# Altium PCB sdram_sram.PcbDoc
Units mm, origin at the board's own origin, x right, y up, seen from the top; angles counter-clockwise.
Board outline 29.21 x 50.8 mm, 2 copper layers (Top Layer, Bottom Layer), stack 1.671 mm thick; 10 components, 41 nets, 156 pads, 41 vias.
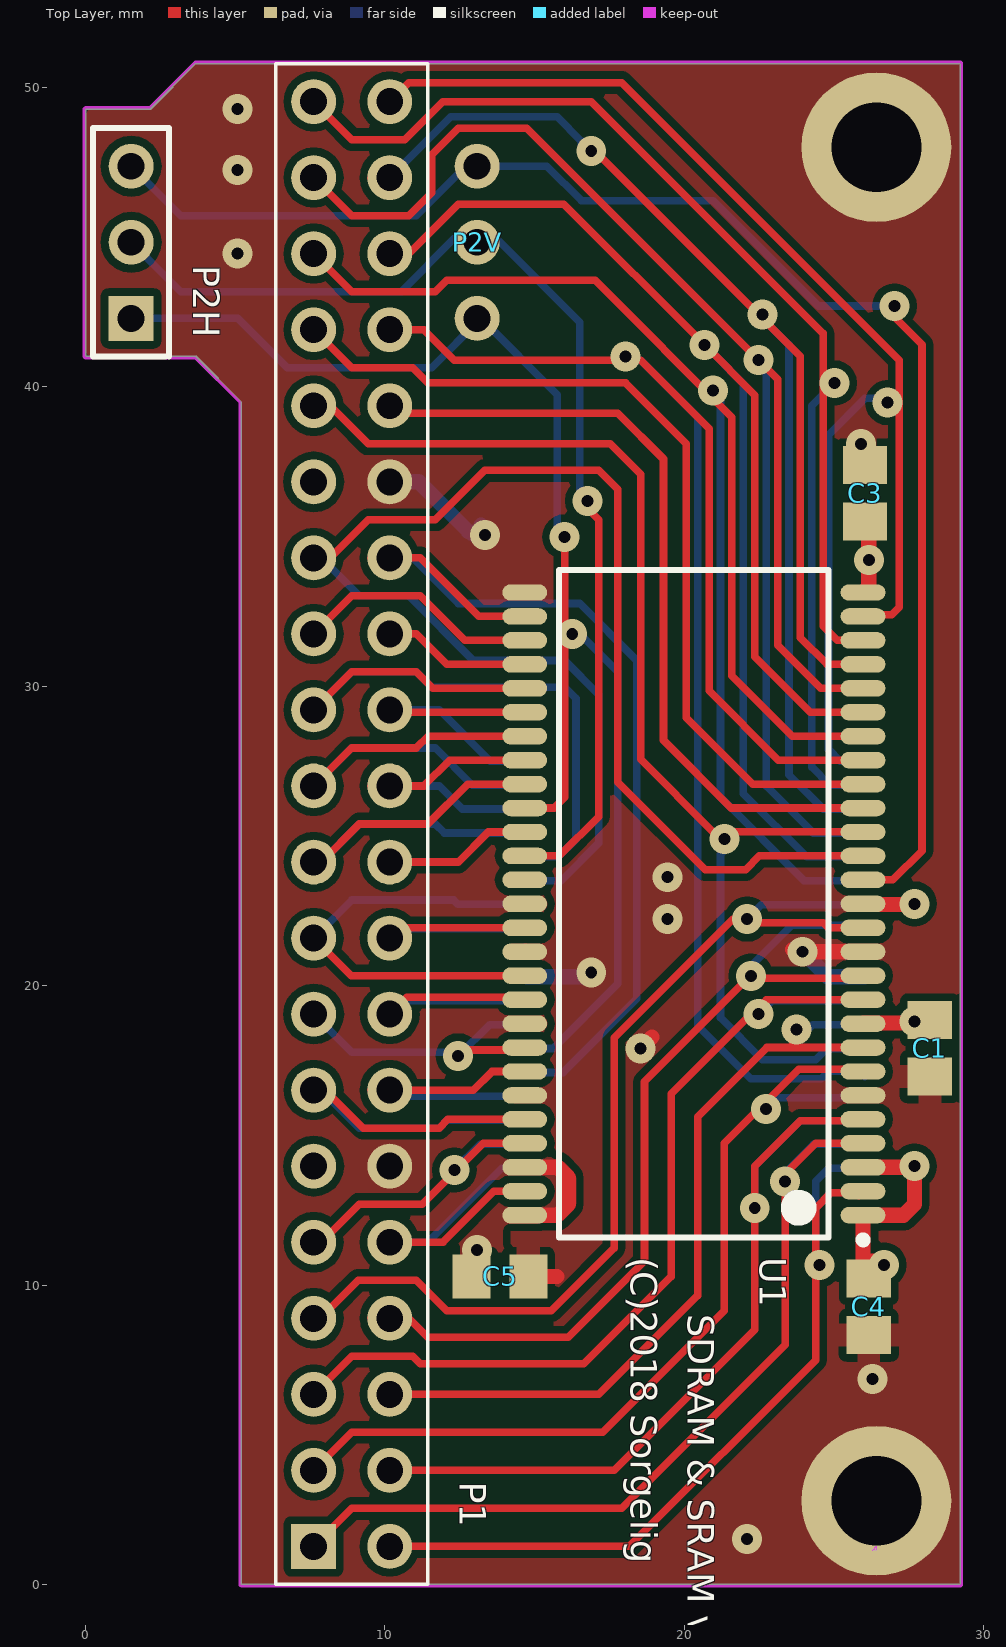
[diagram p0: Top Layer view]
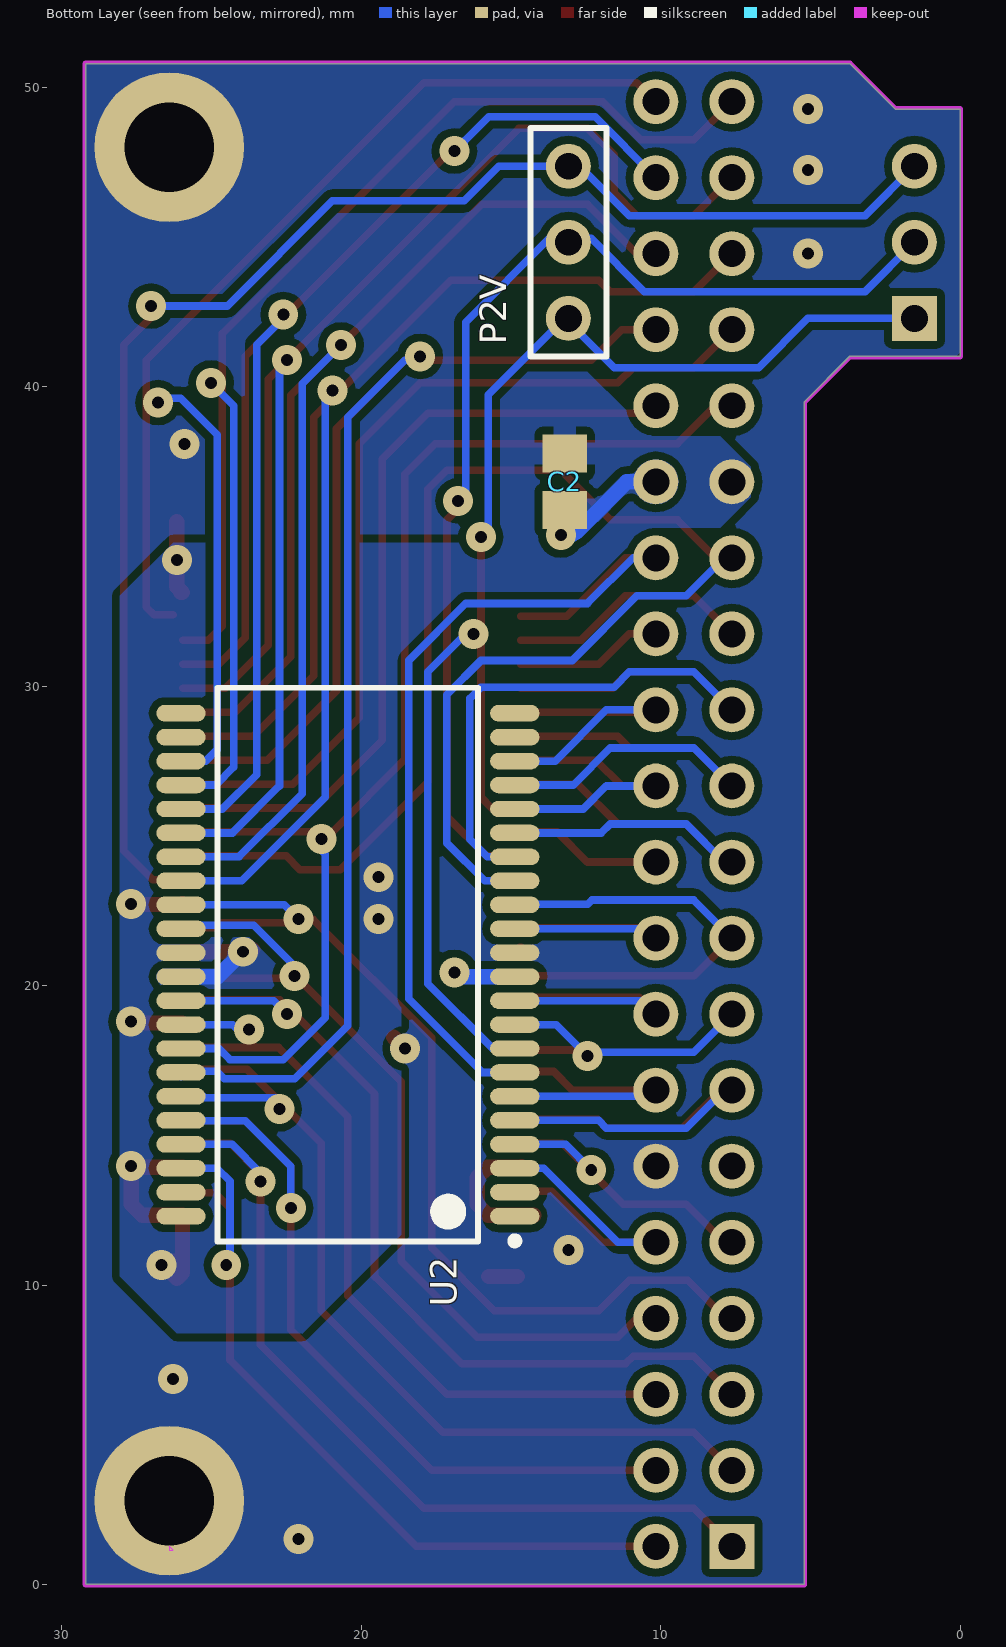
[diagram p1: Bottom Layer view, seen from below]
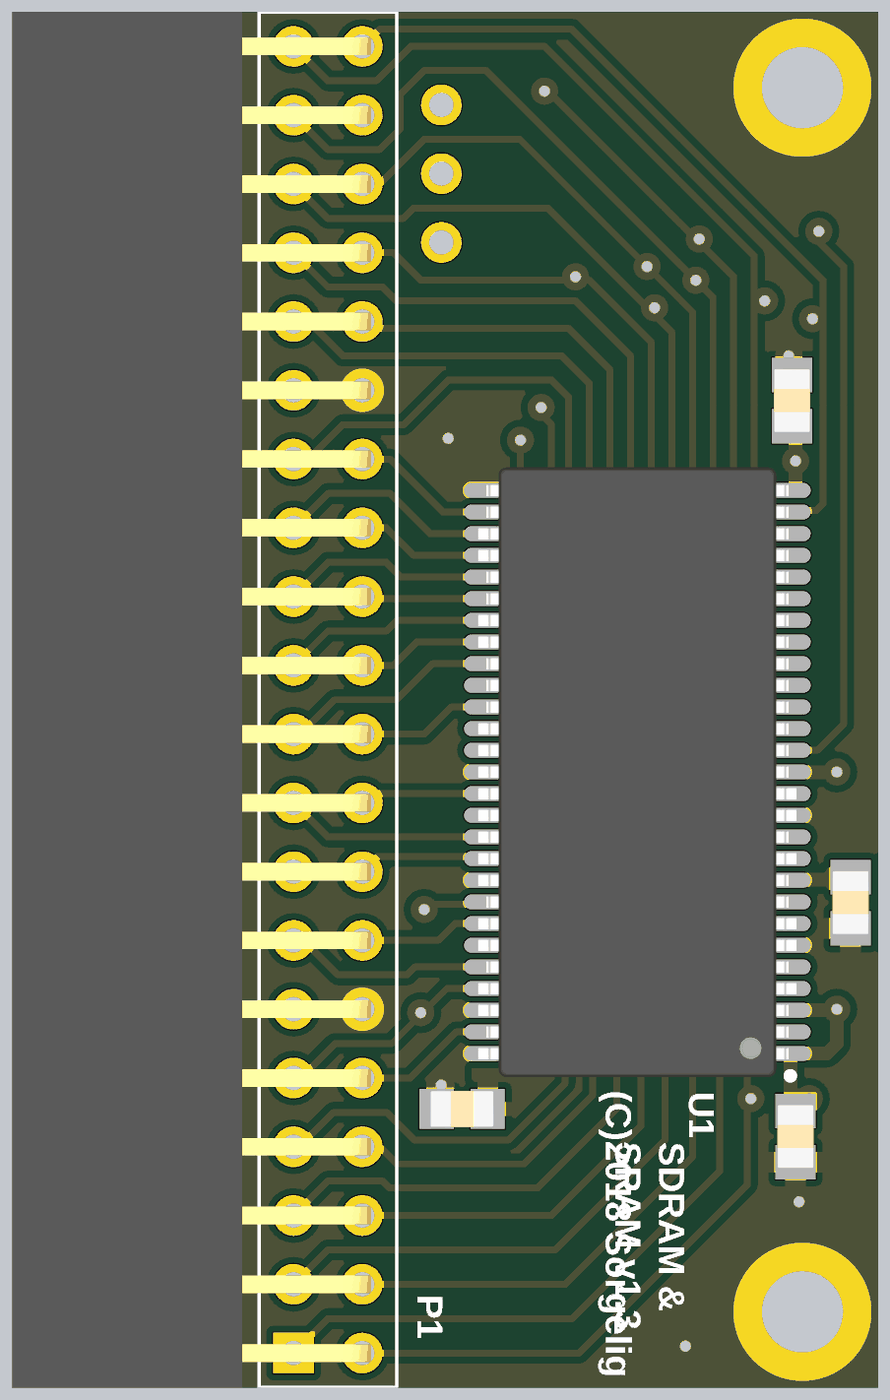
[diagram p2: 3D render of the assembled board from above, using the file's embedded part models]

## Layer stack, top to bottom
Top Solder: solder mask 0.0102, Solder Resist, Dk 3.5
Top Layer: signal copper 0.0356
Dielectric 1: dielectric 1.6, FR-4, Dk 4.8
Bottom Layer: signal copper 0.0356
Bottom Solder: solder mask 0.0102, Solder Resist, Dk 3.5

## Board outline
5.207,39.497 3.683,41.021 0,41.021 0,49.276 2.159,49.276 3.683,50.8 29.21,50.8 29.21,0 5.207,0

## Design rules (kind name [scope] priority, off if disabled: settings)
BoardOutlineClearance [All] p1: gap=0 ignorepadtopadclearanceinfootprint=FALSE
Clearance keep-out_clearance [InNamedPolygon('ground') vs OnLayer('Keep-Out Layer')] p1: gap=0 ignorepadtopadclearanceinfootprint=FALSE
Clearance [All] p2: gap=0.254 ignorepadtopadclearanceinfootprint=TRUE except(0: Arc-Hole Track-Hole SMDPad-Hole THPad-Hole Via-Hole Fill-Hole Poly-Hole Region-Hole Text-Hole)
ComponentClearance [All] p1 off: gap=0.254 collisioncheckmode=3 verticalgap=0.254 showdistances=FALSE
Height [All] p1 off: minheight=0 maxheight=25.4 prefheight=12.7
HoleSize [All] p1: absolutevalues=TRUE maxlimit=6 minlimit=0.025 maxpercent=80.000 minpercent=20.000
MinimumSolderMaskSliver [All] p1: minsoldermaskwidth=0.25
PolygonConnect PolygonConnect_1 [HasFootprint('C0805')] p1: connectstyle=Relief reliefconductorwidth=0.762 reliefentries=4 polygonreliefangle="90 Angle" airgapwidth=0.254
PolygonConnect [All] p2: connectstyle=Direct reliefconductorwidth=0.254 reliefentries=4 polygonreliefangle="90 Angle" airgapwidth=0.254
RoutingVias [All] p1: holewidth=0.4 width=1 viastyle="Through Hole" minholewidth=0.4 minwidth=1 maxholewidth=0.4 maxwidth=1
SilkToSolderMaskClearance [IsPad] p1 off: minsilkscreentomaskgap=0.127 clearancetoexposedcopper=TRUE
SolderMaskExpansion SolderMaskExpansion_U1 [InComponent('U1')] p1: expansion=0
SolderMaskExpansion [All] p2: expansion=0.051
Width Width_power [InNetClass('power')] p1: maxlimit=2 minlimit=0.254 preferedwidth=0.508 minimp=50.000000 maximp=50.000000 favimp=50.000000
Width Width_signal [All] p2: maxlimit=0.254 minlimit=0.254 preferedwidth=0.254
25 further rules are at their usual default settings.

## Classes and differential pairs
net class power: GND VCC

## Components (designator, comment, footprint, x,y, rotation, side; value= is the part's Value field where it differs from the comment)
C1 "C0805" C0805 28.194,17.907 r90 top value=0.1uF
C2 "C0805" C0805 13.208,36.83 r90 bottom value=0.1uF
C3 "+" C0805 26.035,36.449 r270 top value=0.1uF
C4 "C0805" C0805 26.162,9.271 r90 top value=0.1uF
C5 "+" C0805 13.843,10.287 r0 top value=0.1uF
P1 "Header 20X2" HDR20x2_90 7.62,1.27 r270 top locked
P2H "Header 3" HDR1X3#1 1.524,42.291 r90 top locked
P2V "Header 3" HDR1X3#2 13.081,42.291 r90 top locked
U1 "AS4C16M16SA-6TCN" TSOP54 20.32,22.733 r180 top
U2 "IS61WV20488BLL-10" ISSI-TSOP-2-44_N 20.447,20.701 r0 bottom

## Footprints (in the part's own frame and the unit in brackets; to place one, negate y for a bottom-side part, rotate by r counter-clockwise, add the part's x,y. Pads: shape width x height; smd on the part's side, far side on the other; paste and mask are expansions set on the pad)
C0805 [mm] "Capacitor, Chip; 2.35 mm L X 1.35 mm W X 1.00 mm H body"
  rect 1.27x1.48 smd: 1(-0.945,0) 2(0.945,0)
  body extent -1.17,-0.67 1.17,0.67, height 1
HDR1X3#1 [mm] "Connector; Header; 3 Position"
  rect 1.5x1.5 hole 0.9: 1(0,0)
  round 1.5 hole 0.9: 2(2.54,0) 3(5.08,0)
  silkscreen extent -1.27,-1.27 6.35,1.27
HDR1X3#2 [mm] "Connector; Header; 3 Position"
  round 1.5 hole 0.9: 1(0,0) 2(2.54,0) 3(5.08,0)
HDR20x2_90 [mm] "Header, Right Angle Receptacle, 2.54 mm pitch; 0.65 mm lead width, 40 pins, 2 rows, 20 pins per row, 50.80 mm L X 8.50 mm W X 5.08 mm H body"
  rect 1.5x1.5 hole 0.9: 1(0,0)
  round 1.5 hole 0.9: 2(0,2.54) 3(-2.54,0) 4(-2.54,2.54) 5(-5.08,0) 6(-5.08,2.54) 7(-7.62,0) 8(-7.62,2.54) 9(-10.16,0) 10(-10.16,2.54) 11(-12.7,0) 12(-12.7,2.54) 13(-15.24,0) 14(-15.24,2.54) 15(-17.78,0) 16(-17.78,2.54) 17(-20.32,0) 18(-20.32,2.54) 19(-22.86,0) 20(-22.86,2.54) 21(-25.4,0) 22(-25.4,2.54) 23(-27.94,0) 24(-27.94,2.54) 25(-30.48,0) 26(-30.48,2.54) 27(-33.02,0) 28(-33.02,2.54) 29(-35.56,0) 30(-35.56,2.54) 31(-38.1,0) 32(-38.1,2.54) 33(-40.64,0) 34(-40.64,2.54) 35(-43.18,0) 36(-43.18,2.54) 37(-45.72,0) 38(-45.72,2.54) 39(-48.26,0) 40(-48.26,2.54)
  silkscreen extent -49.53,-1.27 1.27,3.81, body extent -49.53,-10.39 1.27,2.87, height 5.08
ISSI-TSOP-2-44_N [mm] "SOP, 44-Leads, Body 18.5x10.3mm, Pitch 0.8mm, IPC Medium Density"
  oval 1.65x0.55 smd mask+0: 1(-5.575,8.4) 2(-5.575,7.6) 3(-5.575,6.8) 4(-5.575,6) 5(-5.575,5.2) 6(-5.575,4.4) 7(-5.575,3.6) 8(-5.575,2.8) 9(-5.575,2) 10(-5.575,1.2) 11(-5.575,0.4) 12(-5.575,-0.4) 13(-5.575,-1.2) 14(-5.575,-2) 15(-5.575,-2.8) 16(-5.575,-3.6) 17(-5.575,-4.4) 18(-5.575,-5.2) 19(-5.575,-6) 20(-5.575,-6.8) 21(-5.575,-7.6) 22(-5.575,-8.4) 23(5.575,-8.4) 24(5.575,-7.6) 25(5.575,-6.8) 26(5.575,-6) 27(5.575,-5.2) 28(5.575,-4.4) 29(5.575,-3.6) 30(5.575,-2.8) 31(5.575,-2) 32(5.575,-1.2) 33(5.575,-0.4) 34(5.575,0.4) 35(5.575,1.2) 36(5.575,2) 37(5.575,2.8) 38(5.575,3.6) 39(5.575,4.4) 40(5.575,5.2) 41(5.575,6) 42(5.575,6.8) 43(5.575,7.6) 44(5.575,8.4)
  silkscreen extent -5.7,-9.25 4.35,9.35, body extent -5.15,-9.25 5.15,9.25, height 1.2
TSOP54 [mm] "SOP, 54-Leads, Body 22.3x10.2mm, Pitch 0.8mm, IPC Medium Density"
  oval 1.5x0.55 smd: 1(-5.65,10.4) 2(-5.65,9.6) 3(-5.65,8.8) 4(-5.65,8) 5(-5.65,7.2) 6(-5.65,6.4) 7(-5.65,5.6) 8(-5.65,4.8) 9(-5.65,4) 10(-5.65,3.2) 11(-5.65,2.4) 12(-5.65,1.6) 13(-5.65,0.8) 14(-5.65,0) 15(-5.65,-0.8) 16(-5.65,-1.6) 17(-5.65,-2.4) 18(-5.65,-3.2) 19(-5.65,-4) 20(-5.65,-4.8) 21(-5.65,-5.6) 22(-5.65,-6.4) 23(-5.65,-7.2) 24(-5.65,-8) 25(-5.65,-8.8) 26(-5.65,-9.6) 27(-5.65,-10.4) 28(5.65,-10.4) 29(5.65,-9.6) 30(5.65,-8.8) 31(5.65,-8) 32(5.65,-7.2) 33(5.65,-6.4) 34(5.65,-5.6) 35(5.65,-4.8) 36(5.65,-4) 37(5.65,-3.2) 38(5.65,-2.4) 39(5.65,-1.6) 40(5.65,-0.8) 41(5.65,0) 42(5.65,0.8) 43(5.65,1.6) 44(5.65,2.4) 45(5.65,3.2) 46(5.65,4) 47(5.65,4.8) 48(5.65,5.6) 49(5.65,6.4) 50(5.65,7.2) 51(5.65,8) 52(5.65,8.8) 53(5.65,9.6) 54(5.65,10.4)
  silkscreen extent -5.77,-11.15 4.5,11.35, body extent -5.88,-11.25 5.88,11.27, height 1

## Part data
C1 C2 C4: "Ceramic Chip Capacitor - Standard", PackageDocument=Mar-2001, Code_IPC=2012[0805], Code_JEITA=0805, ComponentLink1Description="Manufacturer Link", ComponentLink1URL=http://www.kemet.com/, ComponentLink2Description=Datasheet, ComponentLink2URL=http://www.kemet.com/kemet/web/homepage/kechome.nsf/vapubfilesname/F3102TA.pdf/$file/F3102TA.pdf, DatasheetDocument=Mar-2001, LatestRevisionDate=19-Mar-2004, LatestRevisionNote="Silkscreen size reduced.", Note="Footprint corresponds to dimensions for bulk cassette packaging. This case size has tightened tolerances.", PackageReference=0805, Published=17-Jul-2002, Publisher="Altium Limited"
C3 C5: library part C0805, "Ceramic Chip Capacitor - Standard", PackageDocument=Mar-2001, Code_IPC=2012[0805], Code_JEITA=0805, ComponentLink1Description="Manufacturer Link", ComponentLink1URL=http://www.kemet.com/, ComponentLink2Description=Datasheet, ComponentLink2URL=http://www.kemet.com/kemet/web/homepage/kechome.nsf/vapubfilesname/F3102TA.pdf/$file/F3102TA.pdf, DatasheetDocument=Mar-2001, LatestRevisionDate=19-Mar-2004, LatestRevisionNote="Silkscreen size reduced.", Note="Footprint corresponds to dimensions for bulk cassette packaging. This case size has tightened tolerances.", PackageReference=0805, Published=17-Jul-2002, Publisher="Altium Limited"
P1: "Header, 20-Pin, Dual row", LatestRevisionDate=17-Jul-2002, LatestRevisionNote="Re-released for DXP Platform.", Publisher="Altium Limited"
P2H P2V: "Header, 3-Pin", LatestRevisionDate=17-Jul-2002, LatestRevisionNote="Re-released for DXP Platform.", Publisher="Altium Limited"
U1: "256Mb SDR SDRAM, 16Mb x 16, 6ns, 3.3V, 54-Pin TSOP", Manufacturer=Micron, Op. Temp.="0C to +70C", PartNumber=MT48LC16M16A2P-6A, Voltage=3.3V, CL="CL = 3", Clock Rate="167 MHz", ComponentLink1Description="Manufacturer URL", ComponentLink1URL=http://www.micron.com/, ComponentLink2Description=Datasheet, ComponentLink2URL=http://www.micron.com/~/media/Documents/Products/Data%20Sheet/DRAM/256Mb_sdr.pdf, ComponentLink3Description="Package Specification", ComponentLink3URL=http://www.micron.com/~/media/Documents/Products/Data%20Sheet/DRAM/128mb_x4x8x16_sdram.pdf, Cycle Time=6ns, Data Rate=PC133, DatasheetVersion=Rev.Q, Density=256Mb, Depth=16Mb, Mounting Technology="Surface Mount", PackageDescription="54-Pin Thin Small Outline Package, 10.16 x 22.22 mm, Pitch 0.8 mm", PackageReference=MICT-P-54, PackageVersion=Rev.Q, RoHS=Yes, Width=x16
U2: library part IS61WV20488BLL-10TI, "16 M High Speed CMOS SRAM, 2 M x 8, -40 to 85 degC, 44-Pin SOP (TSOP-2-44)", Manufacturer="Integrated Silicon Solution Inc (ISSI)", ComponentLink1Description="Manufacturer URL", ComponentLink1URL=http://www.issi.com/US/index.shtml, ComponentLink2Description=Datasheet, ComponentLink2URL=http://www.issi.com/WW/pdf/61-64WV20488.pdf, ComponentLink3Description="Package Specification", ComponentLink3URL=http://www.issi.com/WW/pdf/61-64WV6416EEBLL.pdf, DatasheetVersion="Rev. B", Mounting Technology="Surface Mount", Organization="2M x 8", PackageDescription="44-Pin 400 mil TSOP-2, Body 18.41 x 10.16 mm, Pitch 0.8 mm", PackageReference=TSOP-2-44, PackageVersion="Rev. F, 06/2008", Packing="Tray / Tube", PartNumber=IS61WV20488BLL-10TI, Speed (ns)=10

## Free pads (board coordinates)
  round 5 hole 3: ""(26.416,2.794) ""(26.416,48.006)

## Via types
v1: diameter 1, hole 0.4, Top Layer to Bottom Layer, tented both sides, 41 vias

## Nets (pads, with @x,y where several pads share a name; then routed paths per layer and width w, separated by ;. In a path a pad name is that pad's centre, name@x,y a point inside that pad or via, vN(x,y) a via of type N, cw(c..) or ccw(c..) an arc to the next point about the centre after c; other vN are vias at no path point)
A0: P1.37 U1.23 U2.28 | length 52.1
  Top Layer w0.254: P1.37 8.89,45.72 10.795,45.72 11.557,46.482 11.557,47.752 12.446,48.641 14.732,48.641 v1(22.479,40.894) 23.114,40.259 23.114,31.369 24.55,29.933 U1.23
  Bottom Layer w0.254: v1(22.479,40.894) 22.733,40.64 22.733,26.67 24.302,25.101 U2.28
A1: P1.38 U1.24 U2.27 | length 49
  Top Layer w0.254: P1.38@9.525,46.99 P1.38 ; v1@16.828,47.816 17.081,47.816 23.876,41.021 23.876,31.623 24.766,30.733 U1.24
  Bottom Layer w0.254: P1.38 12.192,49.022 15.748,49.022 16.558,48.212 v1@16.558,47.927 ; v1(22.606,42.418) 22.606,42.291 23.495,41.402 23.495,27.051 24.645,25.901 U2.27
  other v1: 16.891,47.879
A2: P1.39 U1.25 U2.26 | length 47.9
  Top Layer w0.254: P1.39 8.89,48.26 10.668,48.26 11.938,49.53 16.891,49.53 24.638,41.783 24.638,32.004 25.109,31.533 U1.25
  Bottom Layer w0.254: v1@24.995,40.108 24.257,39.37 24.257,27.305 24.861,26.701 U2.26 ; v1(25.019,40.132) v1@25.249,40.132
A3: P1.40 U1.26 U2.25 | length 45
  Top Layer w0.254: P1.40 10.795,50.165 17.907,50.165 27.178,40.894 27.178,32.639 26.924,32.385 U1.26@26.289,32.385
  Bottom Layer w0.254: U2.25@25.751,27.645 U2.25@25.895,27.501 ; U2.25 25.204,27.501 24.816,27.889 24.816,38.405 26.035,39.624 26.639,39.624 v1(26.79,39.473)
A4: P1.28 U1.29 U2.7 | length 31.5
  Top Layer w0.254: P1.28@9.525,34.29 P1.28 11.176,34.29 13.133,32.333 U1.29
  Bottom Layer w0.254: P1.28 10.922,34.29 12.446,32.766 16.51,32.766 18.415,30.861 18.415,19.558 15.958,17.101 U2.7
A5: P1.25 U1.30 | length 8.2
  Top Layer w0.254: P1.25 8.89,33.02 11.176,33.02 12.663,31.533 U1.30
A6: P1.26 U1.31 | length 5.8
  Top Layer w0.254: P1.26@9.652,31.75 P1.26 11.049,31.75 12.066,30.733 U1.31
  Bottom Layer w0.254: P1.26 P1.26@10.414,31.496
A7: P1.23 U1.32 U2.16 | length 24
  Top Layer w0.254: P1.23 8.89,30.48 11.049,30.48 11.596,29.933 U1.32
  Bottom Layer w0.254: P1.23 8.89,30.48 11.049,30.48 11.557,29.972 16.002,29.972 16.383,29.591 16.383,24.892 15.792,24.301 U2.16@14.745,24.301
A8: P1.24 U1.33 U2.20 | length 10.3
  Top Layer w0.254: P1.24@9.652,29.21 P1.24 10.237,29.133 U1.33
  Bottom Layer w0.254: P1.24 11.811,29.21 13.52,27.501 U2.20@14.745,27.501
A9: P1.21 U1.34 U2.19 | length 15.9
  Top Layer w0.254: P1.21 8.89,27.94 11.049,27.94 11.442,28.333 U1.34
  Bottom Layer w0.254: P1.21 8.89,27.94 11.684,27.94 12.923,26.701 U2.19@14.745,26.701
A10: P1.36 U1.22 U2.29 | length 49.1
  Top Layer w0.254: P1.36 10.795,44.45 12.446,46.101 15.978,46.101 v1(20.677,41.402) 22.352,39.727 22.352,30.988 24.207,29.133 U1.22
  Bottom Layer w0.254: v1(20.677,41.402) 21.971,40.108 21.971,26.416 24.086,24.301 U2.29
A11: P1.22 U1.35 U2.18 | length 10.4
  Top Layer w0.254: P1.22@9.525,26.67 P1.22 11.303,26.67 12.166,27.533 U1.35
  Bottom Layer w0.254: P1.22 11.811,26.67 12.58,25.901 U2.18@14.745,25.901
A12: P1.19 U1.36 U2.17 | length 16
  Top Layer w0.254: P1.19 7.874,24.13 9.144,25.4 11.43,25.4 12.763,26.733 U1.36
  Bottom Layer w0.254: P1.19 7.874,24.13 9.144,25.4 11.684,25.4 11.983,25.101 U2.17
BA0: P1.34 U1.20 U2.38 | length 56.5
  Top Layer w0.254: P1.34 11.303,41.91 12.319,40.894 v1@18.034,40.894 ; 18.542,40.894 20.828,38.608 20.828,29.845 23.14,27.533 U1.20
  Bottom Layer w0.254: v1(18.034,41.021) 18.161,40.894 18.542,40.894 20.447,38.989 20.447,18.669 22.225,16.891 24.572,16.891 24.826,17.145 25.834,17.145 U2.38@26.022,16.957
BA1: P1.35 U1.21 U2.30 | length 50.1
  Top Layer w0.254: P1.35 8.89,43.18 11.684,43.18 12.065,43.561 17.018,43.561 21.59,38.989 21.59,30.353 23.61,28.333 U1.21
  Bottom Layer w0.254: v1(20.955,39.878) 21.209,39.624 21.209,26.289 23.997,23.501 U2.30
CAS: P1.31 U1.17 U2.37 | length 41.2
  Top Layer w0.254: P1.31 8.169,39.37 9.439,38.1 17.526,38.1 18.542,37.084 18.542,27.559 20.955,25.146 25.957,25.146 U1.17
  Bottom Layer w0.254: v1@21.463,24.638 21.209,24.384 21.209,18.923 22.606,17.526 24.384,17.526 24.759,17.901 U2.37
  other v1: 21.336,24.892
CKE: P2H.1 P2V.1 U1.37 U2.8 | length 48.5
  Top Layer w0.254: U1.37 15.646,25.933 16.002,26.289 v1(16.002,34.989)
  Bottom Layer w0.254: P2H.1 5.08,42.291 6.731,40.64 11.557,40.64 13.208,42.291 15.755,39.744 15.755,34.742 v1(16.002,34.989) ; U2.8 15.615,17.901 17.78,20.066 17.78,30.48 16.51,31.75 v1(16.256,31.75)
CLK: P1.20 U1.38 | length 5.2
  Top Layer w0.254: P1.20@9.906,24.13 P1.20 12.446,24.13 13.449,25.133 U1.38
CS: P1.33 U1.19 | length 30
  Top Layer w0.254: P1.33 8.89,40.64 10.922,40.64 11.43,40.132 18.034,40.132 20.066,38.1 20.066,28.956 22.289,26.733 U1.19
DH: P2H.2 P2V.2 U1.39 | length 37
  Top Layer w0.254: U1.39 15.824,24.333 17.137,25.646 17.137,35.568 v1@16.637,36.068
  Bottom Layer w0.254: P2H.2 3.175,43.18 10.541,43.18 12.319,44.958 13.716,44.958 16.51,42.164 v1@16.51,36.322
  other v1: 16.764,36.195
DL: P2H.3 P2V.3 U1.15 | length 49.7
  Top Layer w0.254: U1.15 26.962,23.533 27.94,24.511 27.94,41.402 27.021,42.321 v1(27.021,42.702)
  Bottom Layer w0.254: P2H.3 3.175,45.72 11.049,45.72 12.7,47.371 P2V.3 15.408,47.371 16.567,46.213 20.97,46.213 24.481,42.702 v1(27.021,42.702)
DQ0: P1.2 U1.2 U2.42 | length 27.7
  Top Layer w0.254: P1.2 18.161,1.27 24.384,7.493 24.384,12.573 24.892,13.081 U1.2@25.273,13.081 ; U1.2@25.826,12.989 U1.2
  Bottom Layer w0.254: v1(24.511,10.668) 24.384,10.795 24.384,13.462 24.823,13.901 U2.42@25.895,13.901
DQ1: P1.1 U1.4 U2.41 | length 30.5
  Top Layer w0.254: P1.1 8.89,2.54 17.907,2.54 23.368,8.001 v1(23.368,13.462) 23.368,13.716 24.385,14.733 U1.4
  Bottom Layer w0.254: v1(23.368,13.462) 23.368,13.754 24.315,14.701 U2.41@25.895,14.701
DQ2: P1.4 U1.5 U2.40 | length 29.4
  Top Layer w0.254: P1.4 17.653,3.81 22.352,8.509 v1(22.352,12.573) 22.352,13.97 23.876,15.494 U1.5@25.97,15.494
  Bottom Layer w0.254: v1(22.352,12.573) 22.352,13.97 23.876,15.494 25.888,15.494 U2.40@25.895,15.501
DQ3: P1.3 U1.7 U2.39 | length 31.2
  Top Layer w0.254: P1.3 8.89,5.08 17.272,5.08 21.336,9.144 21.336,14.732 23.818,17.214 25.889,17.214 U1.7
  Bottom Layer w0.254: v1(22.733,15.875) 22.479,15.875 22.86,16.256 25.229,16.256 25.274,16.301 U2.39
DQ4: P1.6 U1.8 U2.36 | length 27
  Top Layer w0.254: P1.6 17.145,6.35 20.447,9.652 20.447,15.621 22.759,17.933 23.749,17.933 ; v1(23.749,18.542) 23.749,18.187 23.622,18.06 23.749,17.933 ; U1.8 23.749,17.933
  Bottom Layer w0.254: v1@23.876,18.288 24.289,18.701 U2.36@25.895,18.701
DQ5: P1.5 U1.10 U2.35 | length 31
  Top Layer w0.254: P1.5 8.89,7.62 10.922,7.62 11.176,7.366 16.637,7.366 19.558,10.287 19.558,16.383 v1@22.606,19.431 ; 22.733,19.533 U1.10
  Bottom Layer w0.254: v1(22.479,19.05) 22.93,19.501 U2.35@25.895,19.501
DQ6: P1.8 U1.11 U2.32 | length 29.8
  Top Layer w0.254: P1.8@9.525,8.89 P1.8 10.795,8.89 11.43,8.255 16.129,8.255 18.669,10.795 18.669,16.788 21.971,20.09 v1@21.971,20.193 ; v1@22.03,20.252 25.889,20.252 U1.11
  Bottom Layer w0.254: v1(22.225,20.32) 22.225,20.652 23.587,22.014 25.782,22.014 U2.32@25.895,21.901
DQ7: P1.7 U1.13 U2.31 | length 32.9
  Top Layer w0.254: P1.7 7.833,8.89 9.103,10.16 11.049,10.16 12.065,9.144 15.559,9.144 17.653,11.238 17.653,18.264 21.614,22.225 v1(22.098,22.225) 22.225,22.098 24.638,22.098 24.803,21.933 U1.13
  Bottom Layer w0.254: v1(22.098,22.225) 22.574,22.701 U2.31@25.895,22.701
DQ8: P1.18 U1.42 U2.13 | length 9.4
  Top Layer w0.254: P1.18 10.503,21.933 U1.42
  Bottom Layer w0.254: P1.18 10.471,21.901 U2.13@14.745,21.901
DQ9: P1.17 U1.44 U2.14 | length 15.3
  Top Layer w0.254: P1.17 8.877,20.333 U1.44
  Bottom Layer w0.254: P1.17 8.89,22.86 12.295,22.86 12.434,22.721 14.745,22.721 U2.14@14.745,22.701
DQ10: P1.16 U1.45 U2.10 | length 10.6
  Top Layer w0.254: P1.16@9.652,19.05 P1.16 10.724,19.614 14.589,19.614 U1.45
  Bottom Layer w0.254: P1.16@10.509,18.701 P1.16 10.611,19.501 U2.10@14.745,19.501
DQ11: P1.15 U1.47 U2.9 | length 11.4
  Top Layer w0.254: v1(12.446,17.653) 12.209,17.653 12.408,17.852 14.589,17.852 U1.47 U1.47@14.67,17.919
  Bottom Layer w0.254: P1.15 8.89,17.78 12.021,17.78 v1@12.148,17.653 ; U2.9@14.745,18.701 13.494,18.701 v1(12.446,17.653) ; v1@12.148,17.653 v1(12.446,17.653) ; v1@12.148,17.653 12.297,17.504 v1(12.446,17.653)
DQ12: P1.14 U1.48 U2.6 | length 10.4
  Top Layer w0.254: P1.14@9.525,16.51 P1.14 12.954,16.51 13.577,17.133 U1.48
  Bottom Layer w0.254: P1.14@10.414,16.764 P1.14 10.369,16.301 U2.6@14.745,16.301
DQ13: P1.13 U1.50 U2.5 | length 15.5
  Top Layer w0.254: P1.13 8.001,16.51 9.271,15.24 11.811,15.24 12.104,15.533 U1.50
  Bottom Layer w0.254: P1.13 7.874,16.51 9.144,15.24 11.811,15.24 12.072,15.501 U2.5@14.745,15.501
DQ14: P1.9 U1.51 U2.4 | length 11.2
  Top Layer w0.254: P1.9 7.874,11.43 9.144,12.7 11.25,12.7 13.283,14.733 U1.51
  Bottom Layer w0.254: v1(12.319,13.843) 13.177,14.701 U2.4@14.745,14.701
DQ15: P1.10 U1.53 U2.3 | length 11.3
  Top Layer w0.254: P1.10@9.652,11.43 P1.10 11.938,11.43 13.641,13.133 U1.53
  Bottom Layer w0.254: P1.10 11.43,11.43 13.901,13.901 U2.3@14.745,13.901
GND: C1.1 C2.1 C3.1 C4.1 C5.1 P1.12 P1.30 pad. U1.6 U1.12 U1.28 U1.41 U1.46 U1.52 U1.54 U2.12 U2.34 | length 14.4
  Top Layer w0.508: P1.12@10.16,13.95 P1.12 ; v1@12.954,11.049 v1(13.072,11.167) ; U1.54@14.238,12.333 15.762,12.333 16.129,12.7 16.129,13.589 15.785,13.933 U1.52 U1.52@14.653,13.95 ; v1@18.796,18.161 18.923,18.288 ; v1@23.622,21.209 23.698,21.133 v1(23.952,21.133) U1.12
  Bottom Layer w0.508: P1.30 11.132,36.83 12.783,35.179 12.785,35.178 v1@13.208,34.925 ; C2.1@13.208,35.377 v1@13.208,34.925 ; v1(13.335,35.052) v1@13.208,34.925 ; v1@23.698,21.133 v1@23.876,20.955 ; v1(23.952,21.133) 24.784,20.301 U2.34
  other v1: 22.098,1.524 26.289,6.858 18.542,17.907 25.908,38.1 5.08,44.45 5.08,47.244 5.08,49.276
RAS: P1.32 U1.18 | length 26.9
  Top Layer w0.254: P1.32 10.414,39.116 17.78,39.116 19.304,37.592 19.304,28.194 21.565,25.933 U1.18
VCC: C1.2 C2.2 C3.2 C4.2 C5.2 P1.29 U1.1 U1.3 U1.9 U1.14 U1.27 U1.43 U1.49 U2.11 U2.33 | length 17.7
  Top Layer w0.508: U1.43 U1.43@14.687,21.15 ; C5.2 15.748,10.287 ; U1.3 v1@27.469,13.933 ; U1.9 25.987,18.75 27.767,18.75 27.813,18.796 v1(27.686,18.796) ; U1.14 25.987,22.716 27.796,22.716 27.779,22.733 v1(27.686,22.733) ; U1.27@26.035,33.133 U1.27 26.162,33.325 v1(26.162,34.22) C3.2@26.162,35.504 ; C4.2@26.289,10.795 26.416,10.668 C4.2@26.614,10.668 ; v1(26.67,10.668) C4.2@26.614,10.668 ; v1@27.686,13.716 27.686,12.7 27.319,12.333 U1.1 25.97,10.408 C4.2 C4.2@26.614,10.668
  Bottom Layer w0.508: P1.29 P1.29@7.747,36.83 ; U2.11@14.745,20.301 16.745,20.301 v1(16.891,20.447) ; v1(27.686,22.733) 27.813,22.733 v1@27.686,22.86
  other v1: 27.686,13.97 19.431,22.225 19.431,23.622
WE: P1.27 U1.16 U2.15 | length 50.2
  Top Layer w0.254: P1.27 8.169,34.29 9.439,35.56 11.684,35.56 13.335,37.211 17.145,37.211 17.78,36.576 17.78,26.797 20.701,23.876 22.049,23.876 22.506,24.333 U1.16
  Bottom Layer w0.254: P1.27 7.874,34.29 9.144,33.02 10.795,33.02 12.954,30.861 16.002,30.861 17.145,29.718 17.145,24.765 15.881,23.501 U2.15
pads on no net: P1.11 U1.40 U2.1 U2.2 U2.21 U2.22 U2.23 U2.24 U2.43 U2.44

## Polygon pours and split planes (outlines as drawn)
GND on Bottom Layer "ground" (solid, remove dead copper, pour order 19): 5.207,39.497 3.672,41.017 -0.003,41.017 -0.003,49.264 2.158,49.269 3.687,50.804 29.207,50.786 29.207,-0.004 5.207,-0.004
VCC on Bottom Layer "power" (solid, remove dead copper, pour order 18): 18.669,26.931 18.669,11.682 21.973,8.382 26.161,8.382 28.067,10.288 28.067,13.462 28.067,33.02 26.289,34.798 15.367,34.798 15.367,40.513 12.446,40.513 10.29,38.357 8.006,38.357 6.985,37.336 6.985,36.322 8.039,35.268 8.073,35.303 10.284,35.303
GND on Top Layer "ground" (solid, remove dead copper, pour order 23): 5.207,39.497 3.683,41.021 0,41.021 0,49.276 2.159,49.276 3.683,50.8 29.21,50.8 29.21,0 5.207,0
VCC on Top Layer "power" (solid, remove dead copper, pour order 21): 14.195,9.398 17.141,9.398 25.934,16.256 25.934,27.432 14.195,27.432

## Keep-outs
Keep-Out Layer:
  pour cut-out: 26.289,1.143 26.416,1.27 26.416,1.143
  lines w0.1: -0.05,41.021 ccw(c0,41.021) 0,40.971 ; -0.05,41.021 ccw(c0,41.021) 0,40.971 ; -0.05,41.021 -0.05,49.276 ; -0.05,49.276 cw(c0,49.276) 0,49.326 ; -0.05,49.276 cw(c0,49.276) 0,49.326 ; 0,40.971 3.662,40.971 5.157,39.476 5.157,0 ; 0,49.326 2.138,49.326 3.647,50.835 ; 3.647,50.835 cw(c3.683,50.8) 3.683,50.85 ; 3.648,50.835 cw(c3.683,50.8) 3.683,50.85 ; 3.647,50.835 3.648,50.835 ; 3.683,50.85 29.21,50.85 ; 5.157,0 ccw(c5.207,0) 5.207,-0.05 ; 5.157,0 ccw(c5.207,0) 5.207,-0.05 ; 5.207,-0.05 29.21,-0.05 ; 29.21,-0.05 ccw(c29.21,0) 29.26,0 ; 29.21,-0.05 ccw(c29.21,0) 29.26,0 ; 29.21,50.85 cw(c29.21,50.8) 29.26,50.8 ; 29.21,50.85 cw(c29.21,50.8) 29.26,50.8 ; 29.26,0 29.26,50.8

## Silkscreen, mask and mechanical layers (free items; w line width, h text height)
Top Overlay:
  lines w0.2: 2.794,44.704 2.794,41.021 2.794,48.641
  text "(C)2018 Sorgelig" at 17.907,10.922 h1.52 r270
  text "SDRAM & SRAM v1.3" at 19.812,9.017 h1.52 r270